# Altium PCB breakout_HTSSOP.PcbDoc
Units mil, origin at the board's own origin, x right, y up, seen from the top; angles counter-clockwise.
Board outline 6000 x 4000 mil, 2 copper layers (Top Layer, Bottom Layer); 3 components, 16 nets, 32 pads, 0 vias.
Unrouted connection lines stored in the file: 8.
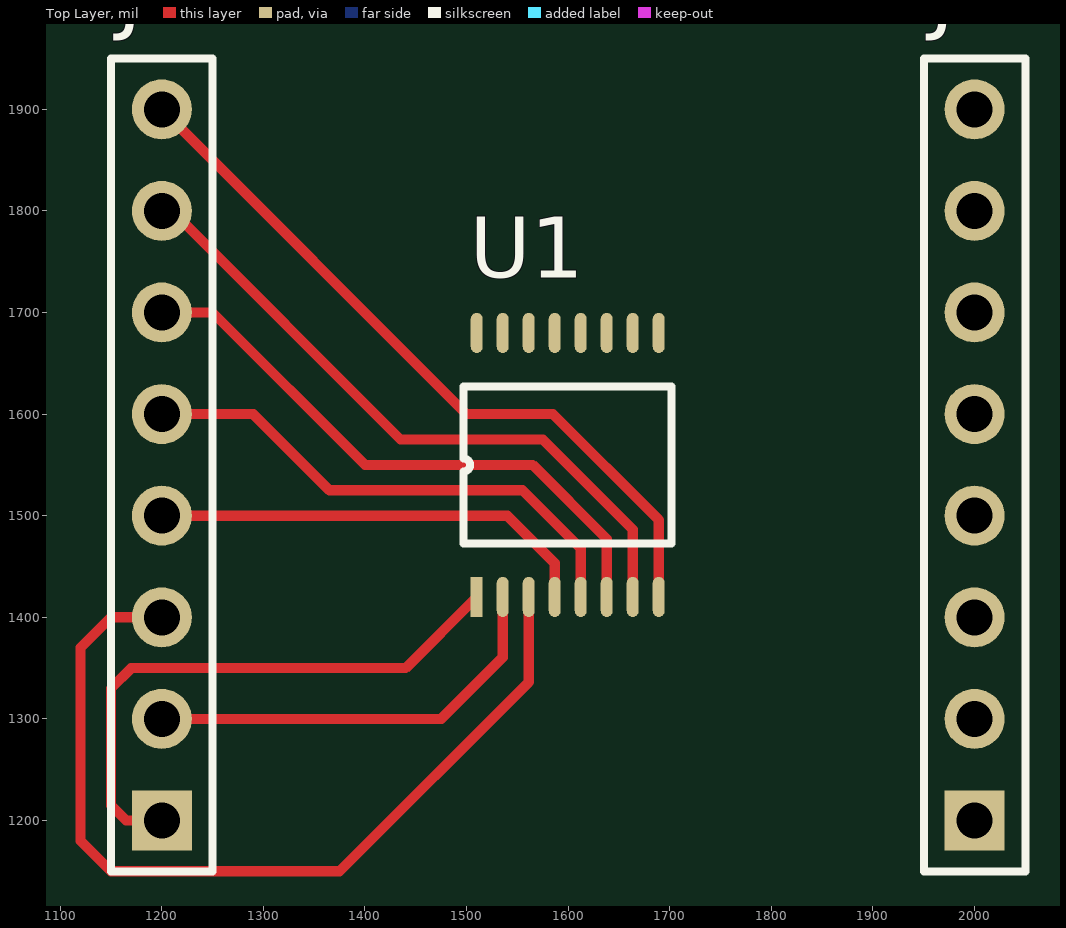
[diagram p0: Top Layer view]
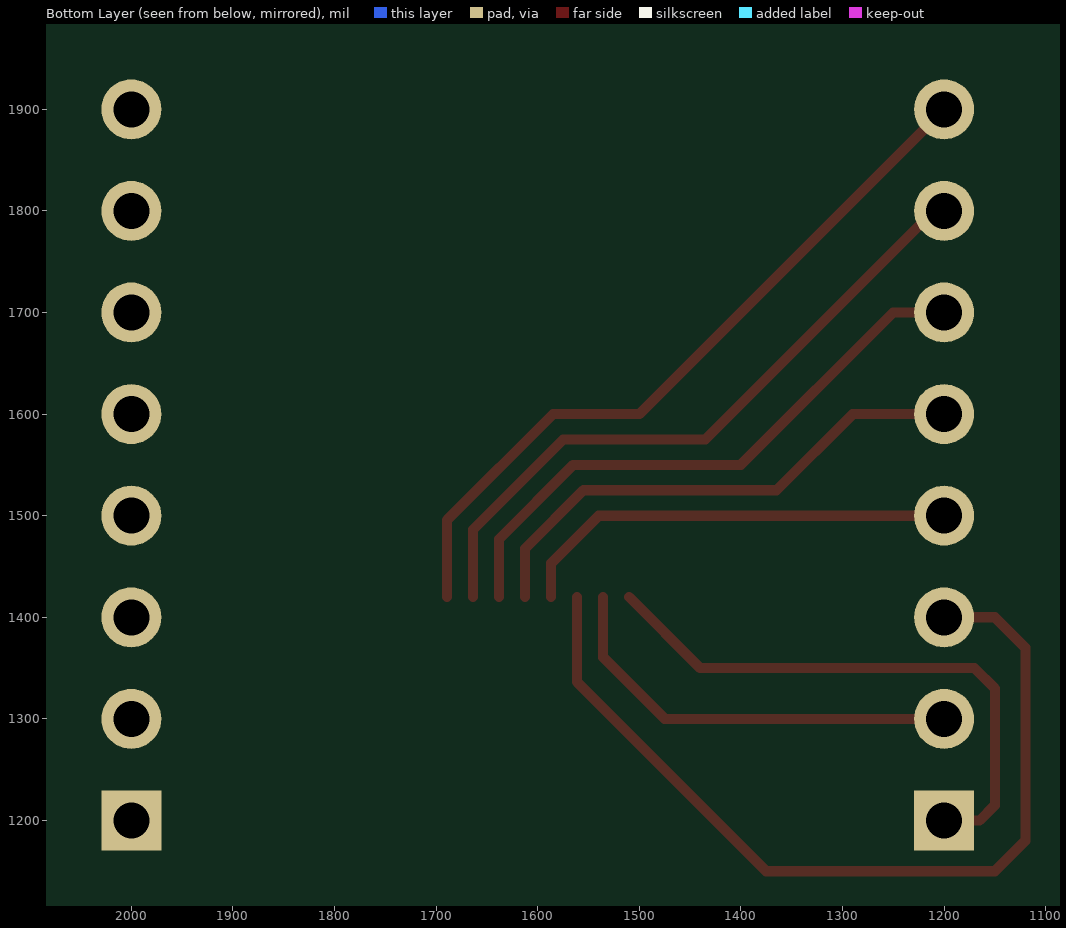
[diagram p1: Bottom Layer view, seen from below]

## Layer stack, top to bottom
Top Solder: solder mask 0.4, Solder Resist, Dk 3.5
Top Layer: signal copper 1.4
Dielectric 1: dielectric 12.6, FR-4, Dk 4.8
Bottom Layer: signal copper 1.4
Bottom Solder: solder mask 0.4, Solder Resist, Dk 3.5

## Board outline
1000,1000 7000,1000 7000,5000 1000,5000

## Design rules (kind name [scope] priority, off if disabled: settings)
Clearance [All] p1: gap=10
PolygonConnect [All] p1: connectstyle=Relief reliefconductorwidth=10 reliefentries=4 polygonreliefangle="90 Angle" airgapwidth=10
RoomDefinition breakout_HTSSOP [InComponentClass('breakout_HTSSOP')] p1: confinementstyle=ConfineIn formatcopy=TRUE lockcomponents=FALSE outline 615,609.13 4185,609.13 4185,2899.13 615,2899.13
RoutingVias [All] p1: holewidth=28 width=50 viastyle="Through Hole" minholewidth=28 minwidth=50 maxholewidth=28 maxwidth=50
SolderMaskExpansion [All] p1: expansion=4
UnpouredPolygon [All] p1: allowunpoured=FALSE
Width [All] p1: maxlimit=10 minlimit=10 preferedwidth=10
29 further rules are at their usual default settings.

## Components (designator, comment, footprint, x,y, rotation, side; value= is the part's Value field where it differs from the comment)
J1 "Header 8" HDR1X8 1200,1200 r90 top
J2 "Header 8" HDR1X8 2000,1200 r90 top
U1 "DRV8833CPWPR" htssop16 1510,1420 r90 top

## Footprints (in the part's own frame and the unit in brackets; to place one, negate y for a bottom-side part, rotate by r counter-clockwise, add the part's x,y. Pads: shape width x height; smd on the part's side, far side on the other; paste and mask are expansions set on the pad)
HDR1X8 [mm] "Connector; Header; 8 Position"
  rect 1.5x1.5 hole 0.9: 1(0,0)
  round 1.5 hole 0.9: 2(2.54,0) 3(5.08,0) 4(7.62,0) 5(10.16,0) 6(12.7,0) 7(15.24,0) 8(17.78,0)
  silkscreen extent -1.27,-1.27 19.05,1.27
htssop16 [mm]
  rect 1x0.3 smd: 1(0,0)
  oval 1x0.3 smd: 2(0,-0.65) 3(0,-1.3) 4(0,-1.95) 5(0,-2.6) 6(0,-3.25) 7(0,-3.9) 8(0,-4.55) 9(6.6,-4.55) 10(6.6,-3.9) 11(6.6,-3.25) 12(6.6,-2.6) 13(6.6,-1.95) 14(6.6,-1.3) 15(6.6,-0.65) 16(6.6,0)
  silkscreen extent 1.33,-4.88 5.27,0.33

## Part data
J1 J2: "Header, 8-Pin"
U1: "Imported"

## Nets (pads, with @x,y where several pads share a name; then routed paths per layer and width w, separated by ;. In a path a pad name is that pad's centre, name@x,y a point inside that pad or via, vN(x,y) a via of type N, cw(c..) or ccw(c..) an arc to the next point about the centre after c; other vN are vias at no path point)
GND: J2.5 U1.13
NetJ1_1: J1.1 U1.1 | length 568.5
  Top Layer w10: J1.1 1165,1200 1150,1215 1150,1330 1170,1350 1440,1350 U1.1
NetJ1_2: J1.2 U1.2 | length 420.1
  Top Layer w10: J1.2 1475,1300 1535.59,1360.59 U1.2
NetJ1_3: J1.3 U1.3 | length 897
  Top Layer w10: J1.3 1150,1400 1120,1370 1120,1180 1150,1150 1375,1150 1561.18,1336.18 U1.3
NetJ1_4: J1.4 U1.4 | length 439.4
  Top Layer w10: J1.4 1540,1500 1586.77,1453.23 U1.4
NetJ1_5: J1.5 U1.5 | length 514.8
  Top Layer w10: J1.5 1290,1600 1365,1525 1555,1525 1612.36,1467.64 U1.5
NetJ1_6: J1.6 U1.6 | length 587.4
  Top Layer w10: J1.6 1250,1700 1400,1550 1565,1550 1637.95,1477.05 U1.6
NetJ1_7: J1.7 U1.7 | length 649.9
  Top Layer w10: J1.7@1210,1800 1435,1575 1575,1575 1663.54,1486.46 U1.7
NetJ1_8: J1.8 U1.8 | length 732.4
  Top Layer w10: J1.8 1500,1600 1585,1600 1689.13,1495.87 U1.8
NetJ2_1: J2.1 U1.9
NetJ2_2: J2.2 U1.10
NetJ2_3: J2.3 U1.11
NetJ2_4: J2.4 U1.12
NetJ2_6: J2.6 U1.14
NetJ2_7: J2.7 U1.15
NetJ2_8: J2.8 U1.16